# EAGLE board A500-EXT-IDE..v1.0.0 (EAGLE 9.0.0), part 1 of 2
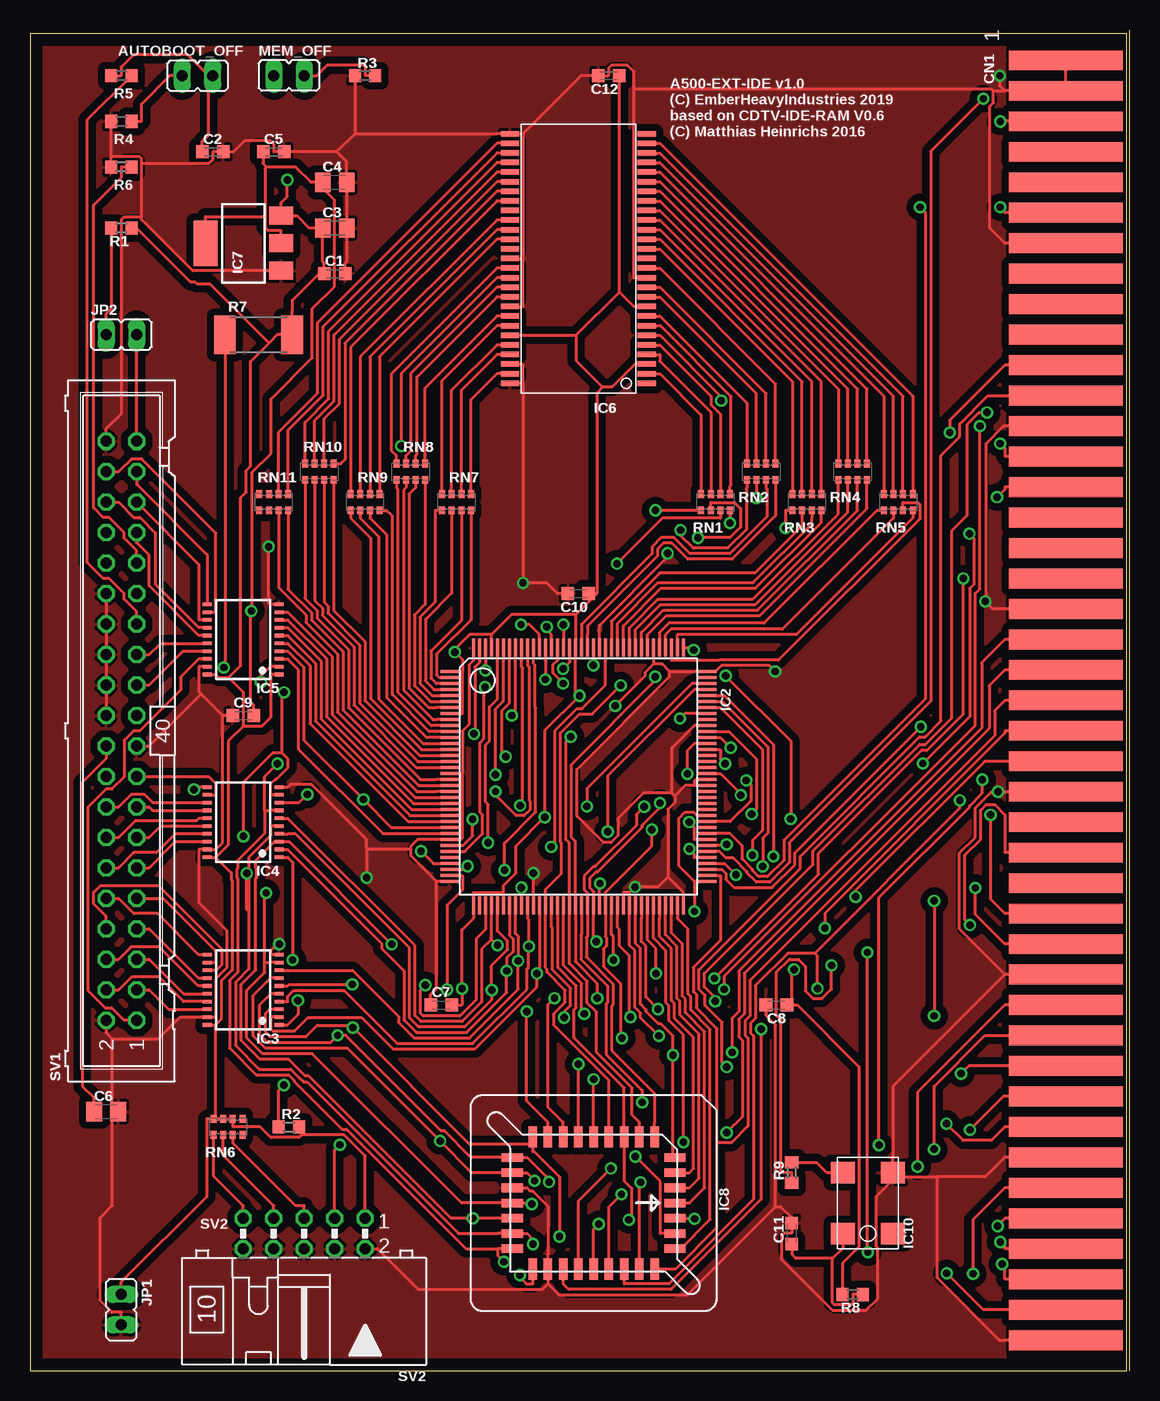
[diagram p0: board, top side]
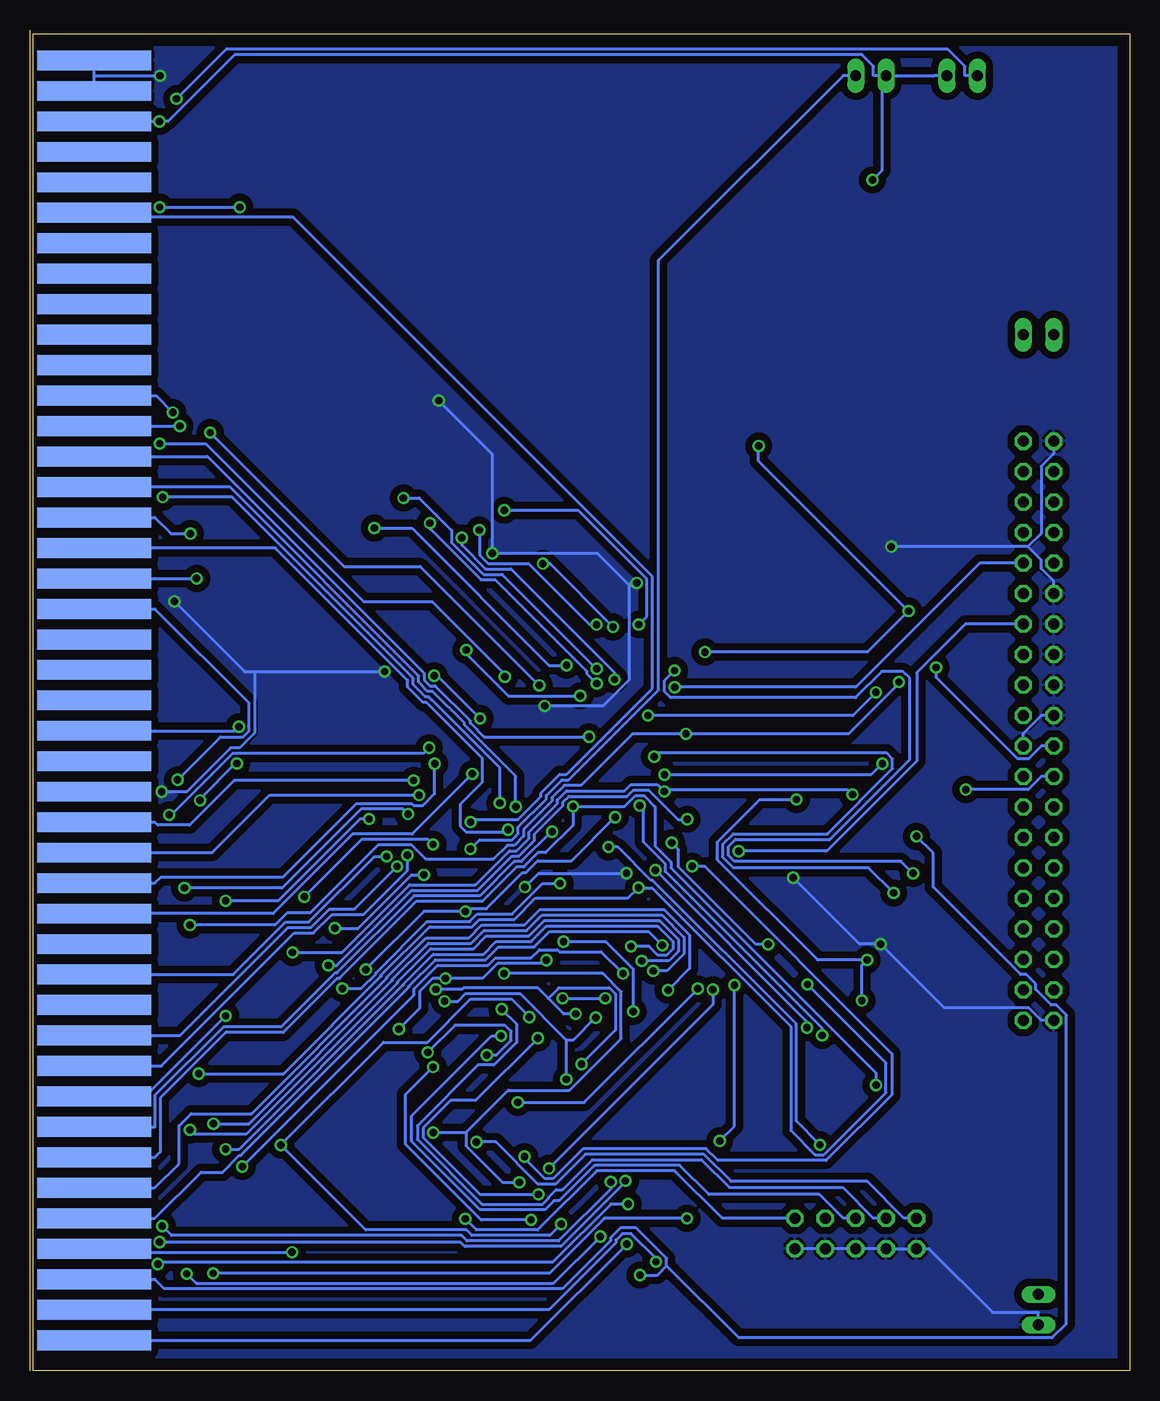
[diagram p1: board, bottom side, seen from below]

Size 91.42 x 111.43 mm. Coordinates in mm from the lower left corner, seen from the top.
Outline: 0,0 91.42,0 91.42,111.43 0,111.43 0,0
Copper layers (1*16): Top 0.035mm / dielectric 0.36mm / Bottom 0.035mm
Design rules "default *": minimum track width 10mil, minimum drill 24mil, track to track 8mil, track to pad 8mil, pad to pad 8mil, via to via 8mil, smd to smd 8mil, copper to edge 40mil, drill to drill 8mil, minimum pad ring 10mil, minimum via ring 8mil, stop-mask expansion 4mil, vias tented up to drill 0mil, thermal gap 10mil

## Footprints (pad centres in the part's own frame; a part is rotated, then mirrored left to right if it is on the bottom)
JP1 = drill 0.914 long: 1 0,-1.27; 2 0,1.27
C0603K = smd 1.05 x 1.08: 1 -0.875,0; 2 0.875,0
C0805K = smd 1.3 x 1.6: 1 -1,0; 2 1,0
LKONT_43-SLOT-SOLDER = smd 1.65 x 9.5: 1 -53.34,5.08; 3 -50.8,5.08; 5 -48.26,5.08; 7 -45.72,5.08; 9 -43.18,5.08; 11 -40.64,5.08; 13 -38.1,5.08; 15 -35.56,5.08; 17 -33.02,5.08; 19 -30.48,5.08; 21 -27.94,5.08; 23 -25.4,5.08; 25 -22.86,5.08; 27 -20.32,5.08; 29 -17.78,5.08; 31 -15.24,5.08; 33 -12.7,5.08; 35 -10.16,5.08; 37 -7.62,5.08; 39 -5.08,5.08; 41 -2.54,5.08; 43 0,5.08; 45 2.54,5.08; 47 5.08,5.08; 49 7.62,5.08; 51 10.16,5.08; 53 12.7,5.08; 55 15.24,5.08; 57 17.78,5.08; 59 20.32,5.08; 61 22.86,5.08; 63 25.4,5.08; 65 27.94,5.08; 67 30.48,5.08; 69 33.02,5.08; 71 35.56,5.08; 73 38.1,5.08; 75 40.64,5.08; 77 43.18,5.08; 79 45.72,5.08; 81 48.26,5.08; 83 50.8,5.08; 85 53.34,5.08 | smd 1.65 x 9.5 bottom: 2 -53.34,5.08; 4 -50.8,5.08; 6 -48.26,5.08; 8 -45.72,5.08; 10 -43.18,5.08; 12 -40.64,5.08; 14 -38.1,5.08; 16 -35.56,5.08; 18 -33.02,5.08; 20 -30.48,5.08; 22 -27.94,5.08; 24 -25.4,5.08; 26 -22.86,5.08; 28 -20.32,5.08; 30 -17.78,5.08; 32 -15.24,5.08; 34 -12.7,5.08; 36 -10.16,5.08; 38 -7.62,5.08; 40 -5.08,5.08; 42 -2.54,5.08; 44 0,5.08; 46 2.54,5.08; 48 5.08,5.08; 50 7.62,5.08; 52 10.16,5.08; 54 12.7,5.08; 56 15.24,5.08; 58 17.78,5.08; 60 20.32,5.08; 62 22.86,5.08; 64 25.4,5.08; 66 27.94,5.08; 68 30.48,5.08; 70 33.02,5.08; 72 35.56,5.08; 74 38.1,5.08; 76 40.64,5.08; 78 43.18,5.08; 80 45.72,5.08; 82 48.26,5.08; 84 50.8,5.08; 86 53.34,5.08
TQFP144 = smd 0.27 x 1.5: 1 -8.75,-10.75; 2 -8.25,-10.75; 3 -7.75,-10.75; 4 -7.25,-10.75; 5 -6.75,-10.75; 6 -6.25,-10.75; 7 -5.75,-10.75; 8 -5.25,-10.75; 9 -4.75,-10.75; 10 -4.25,-10.75; 11 -3.75,-10.75; 12 -3.25,-10.75; 13 -2.75,-10.75; 14 -2.25,-10.75; 15 -1.75,-10.75; 16 -1.25,-10.75; 17 -0.75,-10.75; 18 -0.25,-10.75; 19 0.25,-10.75; 20 0.75,-10.75; 21 1.25,-10.75; 22 1.75,-10.75; 23 2.25,-10.75; 24 2.75,-10.75; 25 3.25,-10.75; 26 3.75,-10.75; 27 4.25,-10.75; 28 4.75,-10.75; 29 5.25,-10.75; 30 5.75,-10.75; 31 6.25,-10.75; 32 6.75,-10.75; 33 7.25,-10.75; 34 7.75,-10.75; 35 8.25,-10.75; 36 8.75,-10.75; 73 8.75,10.75; 74 8.25,10.75; 75 7.75,10.75; 76 7.25,10.75; 77 6.75,10.75; 78 6.25,10.75; 79 5.75,10.75; 80 5.25,10.75; 81 4.75,10.75; 82 4.25,10.75; 83 3.75,10.75; 84 3.25,10.75; 85 2.75,10.75; 86 2.25,10.75; 87 1.75,10.75; 88 1.25,10.75; 89 0.75,10.75; 90 0.25,10.75; 91 -0.25,10.75; 92 -0.75,10.75; 93 -1.25,10.75; 94 -1.75,10.75; 95 -2.25,10.75; 96 -2.75,10.75; 97 -3.25,10.75; 98 -3.75,10.75; 99 -4.25,10.75; 100 -4.75,10.75; 101 -5.25,10.75; 102 -5.75,10.75; 103 -6.25,10.75; 104 -6.75,10.75; 105 -7.25,10.75; 106 -7.75,10.75; 107 -8.25,10.75; 108 -8.75,10.75 | smd 1.5 x 0.27: 37 10.75,-8.75; 38 10.75,-8.25; 39 10.75,-7.75; 40 10.75,-7.25; 41 10.75,-6.75; 42 10.75,-6.25; 43 10.75,-5.75; 44 10.75,-5.25; 45 10.75,-4.75; 46 10.75,-4.25; 47 10.75,-3.75; 48 10.75,-3.25; 49 10.75,-2.75; 50 10.75,-2.25; 51 10.75,-1.75; 52 10.75,-1.25; 53 10.75,-0.75; 54 10.75,-0.25; 55 10.75,0.25; 56 10.75,0.75; 57 10.75,1.25; 58 10.75,1.75; 59 10.75,2.25; 60 10.75,2.75; 61 10.75,3.25; 62 10.75,3.75; 63 10.75,4.25; 64 10.75,4.75; 65 10.75,5.25; 66 10.75,5.75; 67 10.75,6.25; 68 10.75,6.75; 69 10.75,7.25; 70 10.75,7.75; 71 10.75,8.25; 72 10.75,8.75; 109 -10.75,8.75; 110 -10.75,8.25; 111 -10.75,7.75; 112 -10.75,7.25; 113 -10.75,6.75; 114 -10.75,6.25; 115 -10.75,5.75; 116 -10.75,5.25; 117 -10.75,4.75; 118 -10.75,4.25; 119 -10.75,3.75; 120 -10.75,3.25; 121 -10.75,2.75; 122 -10.75,2.25; 123 -10.75,1.75; 124 -10.75,1.25; 125 -10.75,0.75; 126 -10.75,0.25; 127 -10.75,-0.25; 128 -10.75,-0.75; 129 -10.75,-1.25; 130 -10.75,-1.75; 131 -10.75,-2.25; 132 -10.75,-2.75; 133 -10.75,-3.25; 134 -10.75,-3.75; 135 -10.75,-4.25; 136 -10.75,-4.75; 137 -10.75,-5.25; 138 -10.75,-5.75; 139 -10.75,-6.25; 140 -10.75,-6.75; 141 -10.75,-7.25; 142 -10.75,-7.75; 143 -10.75,-8.25; 144 -10.75,-8.75
TSSOP20 = smd 0.3 x 0.75: 1 -2.925,-3; 2 -2.275,-3; 3 -1.625,-3; 4 -0.975,-3; 5 -0.325,-3; 6 0.325,-3; 7 0.975,-3; 8 1.625,-3; 9 2.275,-3; 10 2.925,-3; 11 2.925,3; 12 2.275,3; 13 1.625,3; 14 0.975,3; 15 0.325,3; 16 -0.325,3; 17 -0.975,3; 18 -1.625,3; 19 -2.275,3; 20 -2.925,3
TSOP-2_54 = smd 1.51 x 0.458: P$1 -5.7,10.4; P$2 -5.7,9.6; P$3 -5.7,8.8; P$4 -5.7,8; P$5 -5.7,7.2; P$6 -5.7,6.4; P$7 -5.7,5.6; P$8 -5.7,4.8; P$9 -5.7,4; P$10 -5.7,3.2; P$11 -5.7,2.4; P$12 -5.7,1.6; P$13 -5.7,0.8; P$14 -5.7,0; P$15 -5.7,-0.8; P$16 -5.7,-1.6; P$17 -5.7,-2.4; P$18 -5.7,-3.2; P$19 -5.7,-4; P$20 -5.7,-4.8; P$21 -5.7,-5.6; P$22 -5.7,-6.4; P$23 -5.7,-7.2; P$24 -5.7,-8; P$25 -5.7,-8.8; P$26 -5.7,-9.6; P$27 -5.7,-10.4; P$28 5.7,-10.4; P$29 5.7,-9.6; P$30 5.7,-8.8; P$31 5.7,-8; P$32 5.7,-7.2; P$33 5.7,-6.4; P$34 5.7,-5.6; P$35 5.7,-4.8; P$36 5.7,-4; P$37 5.7,-3.2; P$38 5.7,-2.4; P$39 5.7,-1.6; P$40 5.7,-0.8; P$41 5.7,0; P$42 5.7,0.8; P$43 5.7,1.6; P$44 5.7,2.4; P$45 5.7,3.2; P$46 5.7,4; P$47 5.7,4.8; P$48 5.7,5.6; P$49 5.7,6.4; P$50 5.7,7.2; P$51 5.7,8; P$52 5.7,8.8; P$53 5.7,9.6; P$54 5.7,10.4
SOT223 = smd 1.5 x 2: 1 -2.3,-3.15; 2 0,-3.15; 3 2.3,-3.15 | smd 3.8 x 2: 4 0,3.15
PLCC-32-SMT-TT = smd 0.71 x 1.78: 1 0,6.785; 2 -1.27,6.785; 3 -2.54,6.785; 4 -3.81,6.785; 14 -3.81,-6.785; 15 -2.54,-6.785; 16 -1.27,-6.785; 17 0,-6.785; 18 1.27,-6.785; 19 2.54,-6.785; 20 3.81,-6.785; 30 3.81,6.785; 31 2.54,6.785; 32 1.27,6.785 | smd 1.78 x 0.71: 5 -5.515,5.08; 6 -5.515,3.81; 7 -5.515,2.54; 8 -5.515,1.27; 9 -5.515,0; 10 -5.515,-1.27; 11 -5.515,-2.54; 12 -5.515,-3.81; 13 -5.515,-5.08; 21 5.515,-5.08; 22 5.515,-3.81; 23 5.515,-2.54; 24 5.515,-1.27; 25 5.515,0; 26 5.515,1.27; 27 5.515,2.54; 28 5.515,3.81; 29 5.515,5.08
7X5 = smd 1.8 x 2: P$1 -2.54,-2.1; P$2 2.54,-2.1; P$3 2.54,2.1; P$4 -2.54,2.1
R0603 = smd 1 x 1.1: 1 -0.85,0; 2 0.85,0
R2512 = smd 1.8 x 3.2: 1 -2.8,0; 2 2.8,0
CAY16 = smd 0.5 x 0.65: 1 -1.2,-0.675; 2 -0.4,-0.675; 3 0.4,-0.675; 4 1.2,-0.675; 5 1.2,0.675; 6 0.4,0.675; 7 -0.4,0.675; 8 -1.2,0.675
ML40 = drill 0.914 octagon: 1 -24.13,-1.27; 2 -24.13,1.27; 3 -21.59,-1.27; 4 -21.59,1.27; 5 -19.05,-1.27; 6 -19.05,1.27; 7 -16.51,-1.27; 8 -16.51,1.27; 9 -13.97,-1.27; 10 -13.97,1.27; 11 -11.43,-1.27; 12 -11.43,1.27; 13 -8.89,-1.27; 14 -8.89,1.27; 15 -6.35,-1.27; 16 -6.35,1.27; 17 -3.81,-1.27; 18 -3.81,1.27; 19 -1.27,-1.27; 20 -1.27,1.27; 21 1.27,-1.27; 22 1.27,1.27; 23 3.81,-1.27; 24 3.81,1.27; 25 6.35,-1.27; 26 6.35,1.27; 27 8.89,-1.27; 28 8.89,1.27; 29 11.43,-1.27; 30 11.43,1.27; 31 13.97,-1.27; 32 13.97,1.27; 33 16.51,-1.27; 34 16.51,1.27; 35 19.05,-1.27; 36 19.05,1.27; 37 21.59,-1.27; 38 21.59,1.27; 39 24.13,-1.27; 40 24.13,1.27
ML10L = drill 0.914 octagon: 1 -5.08,-1.27; 2 -5.08,1.27; 3 -2.54,-1.27; 4 -2.54,1.27; 5 0,-1.27; 6 0,1.27; 7 2.54,-1.27; 8 2.54,1.27; 9 5.08,-1.27; 10 5.08,1.27

## Placement (x,y rotation side)
AUTOBOOT_OFF  [JP1]  13.97,107.95 90 top
C1  100n  [C0603K]  25.4,91.44 0 top
C2  100n  [C0603K]  15.24,101.6 0 top
C3  10u  [C0805K]  25.4,95.25 0 top
C4  10u  [C0805K]  25.4,99.06 0 top
C5  100n  [C0603K]  20.32,101.6 0 top
C6  10u  [C0805K]  6.35,21.59 0 top
C7  100n  [C0603K]  34.29,30.48 0 top
C8  100n  [C0603K]  62.23,30.48 180 top
C9  100n  [C0603K]  17.78,54.61 0 top
C10  100n  [C0603K]  45.72,64.77 180 top
C11  100n  [C0603K]  63.5,11.43 90 top
C12  100n  [C0603K]  48.26,107.95 180 top
CN1  A500-EXPANSION-SLOT-SOLDER  [LKONT_43-SLOT-SOLDER]  81.28,55.88 270 top
IC2  XC95288XL-TQ144  [TQFP144]  45.72,49.53 270 top
IC3  74HCT245PW  [TSSOP20]  17.78,31.75 90 top
IC4  74HCT245PW  [TSSOP20]  17.78,45.72 90 top
IC5  74HCT245PW  [TSSOP20]  17.78,60.96 90 top
IC6  AS4C4M16S-6TCN  [TSOP-2_54]  45.72,92.71 180 top
IC7  LD117AS33TR  [SOT223]  17.78,93.98 90 top
IC8  AM29F010J-SOCKET  [PLCC-32-SMT-TT]  46.99,13.97 270 top
IC10  50MHz  [7X5]  69.85,13.97 90 top
JP1  [JP1]  7.62,5.08 180 top
JP2  [JP1]  7.62,86.36 270 top
MEM_OFF  [JP1]  21.59,107.95 270 top
R1  330  [R0603]  7.62,95.25 180 top
R2  4.7k  [R0603]  21.59,20.32 0 top
R3  4.7k  [R0603]  27.94,107.95 0 top
R4  4.7k  [R0603]  7.62,104.14 0 top
R5  4.7k  [R0603]  7.62,107.95 0 top
R6  4.7k  [R0603]  7.62,100.33 0 top
R7  750mA  [R2512]  19.05,86.36 0 top
R8  FERRITE  [R0603]  68.58,6.35 180 top
R9  47  [R0603]  63.5,16.51 90 top
RN1  33  [CAY16]  57.15,72.39 0 top
RN2  33  [CAY16]  60.96,74.93 0 top
RN3  33  [CAY16]  64.77,72.39 0 top
RN4  33  [CAY16]  68.58,74.93 0 top
RN5  33  [CAY16]  72.39,72.39 0 top
RN6  4.7k  [CAY16]  16.51,20.32 0 top
RN7  33  [CAY16]  35.56,72.39 180 top
RN8  33  [CAY16]  31.75,74.93 180 top
RN9  33  [CAY16]  27.94,72.39 180 top
RN10  33  [CAY16]  24.13,74.93 180 top
RN11  33  [CAY16]  20.32,72.39 180 top
SV1  [ML40]  7.62,53.34 90 top
SV2  [ML10L]  22.86,11.43 180 top

## Library data of the parts
AUTOBOOT_OFF JP1 JP2 MEM_OFF = jumper
C1-C12 R1-R9 = rcl
CN1 = amiga
IC2 = xilinx_xc9572xl-tq100
IC3-IC5 = 74xx-eu
IC6 = Alliance_Memory_By_element14_Batch_1
IC7 = v-reg
IC8 = am29-memory
IC10 = SMD-Crystal
RN1-RN11 = resistor-dil; OC_FARNELL: unknown; OC_NEWARK: unknown
SV1 SV2 = con-harting-ml; OC_FARNELL: unknown; OC_NEWARK: unknown

## Nets
!BERR: CN1.46 IC2.75
!BGACK: CN1.62 IC2.104
!CAS: IC2.120 RN3.3
!CFIN: CN1.12 IC2.80
!CFOUT: CN1.11 IC2.81
!DTACK: CN1.66 IC2.103
!IDE_ACT: JP2.2 SV1.39
!IDE_R: IC5.16 SV1.25
!IDE_W: IC5.17 SV1.23
!LDS: CN1.70 IC2.101
!MEM_CS: IC2.118 RN4.1
!MEM_WE: IC2.121 RN3.2
!RAS: IC2.119 RN3.4
!RESET: CN1.53 IC2.143 IC5.2
!UDS: CN1.72 IC2.105
+3V3: C4.1 C5.1 C7.2 C8.1 C9.2 C10.1 C12.1 IC2.1 IC2.8 IC2.37 IC2.42 IC2.55 IC2.73 IC2.84 IC2.109 IC2.127 IC2.141 IC6.P$3 IC6.P$9 IC6.P$43 IC6.P$49 IC7.2 IC7.4 R8.2
+5V: AUTOBOOT_OFF.1 C1.1 C2.1 C3.1 CN1.5 CN1.6 IC3.20 IC4.20 IC5.1 IC5.20 IC7.3 IC8.32 JP1.1 MEM_OFF.1 R1.1 R2.2 R5.1 R7.2 RN6.6 RN6.7 RN6.8 SV2.1
A1: CN1.29 IC2.57 IC8.12
A2: CN1.27 IC2.54 IC8.11
A3: CN1.26 IC2.52 IC8.10
A4: CN1.24 IC2.50 IC8.9
A5: CN1.21 IC2.49 IC8.8
A6: CN1.23 IC2.51 IC8.7
A7: CN1.28 IC2.53 IC8.6
A8: CN1.30 IC2.56 IC8.5
A9: CN1.32 IC2.58 IC8.27
A10: CN1.34 IC2.59 IC8.26
A11: CN1.36 IC2.60 IC8.23
A12: CN1.38 IC2.61 IC8.25
A13: CN1.39 IC2.64 IC8.4
A14: CN1.41 IC2.66 IC8.28
A15: CN1.43 IC2.74 IC8.29
A16: CN1.45 IC2.76
A17: CN1.47 IC2.79
A18: CN1.52 IC2.83
A19: CN1.54 IC2.91
A20: CN1.56 IC2.95
A21: CN1.58 IC2.96
A22: CN1.57 IC2.97
A23: CN1.59 IC2.98
A_MEM0: IC2.113 RN5.1
A_MEM1: IC2.112 RN5.2
A_MEM2: IC2.111 RN5.3
A_MEM3: IC2.110 RN5.4
A_MEM4: IC2.21 RN11.7
A_MEM5: IC2.20 RN11.8
A_MEM6: IC2.19 RN10.5
A_MEM7: IC2.17 RN10.6
A_MEM8: IC2.16 RN10.7
A_MEM9: IC2.15 RN10.8
A_MEM10: IC2.115 RN4.4
A_MEM11: IC2.14 RN9.5
AS_CPU: CN1.74 IC2.106 R2.1
AS_SOCKET: IC2.107
AUTO_BOOT_OFF: AUTOBOOT_OFF.2 IC2.78 R4.2
BA0: IC2.117 RN4.2
BA1: IC2.116 RN4.3
C_IDE_A0: IC2.24 IC5.7
C_IDE_A1: IC2.26 IC5.5
C_IDE_A2: IC2.25 IC5.6
C_IDE_CS0: IC2.22 IC5.9
C_IDE_CS1: IC2.23 IC5.8
C_IDE_R: IC2.27 IC3.1 IC4.1 IC5.4
C_IDE_W: IC2.28 IC5.3
CKE: IC2.13 RN9.6
CLK: IC2.32
CLK_EXT: IC2.30 R9.1
CLK_MEM: IC2.12 RN9.7
D0: CN1.75 IC2.134 IC3.3 IC8.13
D1: CN1.77 IC2.136 IC3.5 IC8.14
D2: CN1.79 IC2.39 IC3.7 IC8.15
D3: CN1.81 IC2.138 IC3.9 IC8.17
D4: CN1.83 IC2.140 IC4.3 IC8.18
D5: CN1.86 IC2.142 IC4.5 IC8.19
D6: CN1.84 IC2.139 IC4.7 IC8.20
D7: CN1.82 IC2.137 IC4.9 IC8.21
D8: CN1.80 IC2.135 IC4.8
D9: CN1.78 IC2.40 IC4.6
D10: CN1.76 IC2.41 IC4.4
D11: CN1.71 IC2.43 IC4.2
D12: CN1.69 IC2.44 IC3.8
D13: CN1.67 IC2.45 IC3.6
D14: CN1.65 IC2.46 IC3.4
D15: CN1.63 IC2.48 IC3.2
DQ0: IC2.133 RN1.1
DQ1: IC2.132 RN1.2
DQ2: IC2.131 RN1.3
DQ3: IC2.130 RN1.4
DQ4: IC2.129 RN2.1
DQ5: IC2.128 RN2.2
DQ6: IC2.126 RN2.3
DQ7: IC2.125 RN2.4
DQ8: IC2.10 RN8.5
DQ9: IC2.9 RN8.6
DQ10: IC2.7 RN8.7
DQ11: IC2.6 RN8.8
DQ12: IC2.5 RN7.5
DQ13: IC2.4 RN7.6
DQ14: IC2.3 RN7.7
DQ15: IC2.2 RN7.8
GND: C1.2 C2.2 C3.2 C4.2 C5.2 C6.2 C7.1 C8.2 C9.1 C10.2 C11.2 C12.2 CN1.1 CN1.2 CN1.3 CN1.4 CN1.13 CN1.25 CN1.37 CN1.49 CN1.61 CN1.73 CN1.85 IC2.18 IC2.29 IC2.36 IC2.47 IC2.62 IC2.72 IC2.89 IC2.90 IC2.99 IC2.108 IC2.114 IC2.123 IC2.144 IC3.10 IC3.19 IC4.10 IC4.19 IC5.10 IC5.19 IC6.P$6 IC6.P$12 IC6.P$28 IC6.P$41 IC6.P$46 IC6.P$52 IC6.P$54 IC7.1 IC8.16 IC8.22 IC10.P$2 JP1.2 R3.1 R4.1 R6.1 SV1.2 SV1.19 SV1.22 SV1.24 SV1.26 SV1.28 SV1.30 SV1.40 SV2.2 SV2.4 SV2.6 SV2.8 SV2.10
IDE_A0: IC5.13 SV1.35
IDE_A1: IC5.15 SV1.33
IDE_A2: IC5.14 SV1.36
IDE_CS0: IC5.11 SV1.37
IDE_CS1: IC5.12 SV1.38
IDE_IRQ: IC2.31 R6.2 SV1.31
IDE_RST: IC5.18 SV1.1
IDE_WAIT: IC2.33 R5.2 SV1.27
IDED0: IC4.12 SV1.17
IDED1: IC4.14 SV1.15
IDED2: IC4.16 SV1.13
IDED3: IC4.18 SV1.11
IDED4: IC3.12 SV1.9
IDED5: IC3.14 SV1.7
IDED6: IC3.16 SV1.5
IDED7: IC3.18 SV1.3
IDED8: IC3.17 SV1.4
IDED9: IC3.15 SV1.6
IDED10: IC3.13 SV1.8
IDED11: IC3.11 SV1.10
IDED12: IC4.17 SV1.12
IDED13: IC4.15 SV1.14
IDED14: IC4.13 SV1.16
IDED15: IC4.11 SV1.18
KEY_PIN_POWER: C6.1 R7.1 SV1.20
LDQM: IC2.124 RN3.1
MEM_OFF: IC2.77 MEM_OFF.2 R3.2
N$1: IC6.P$26 RN5.5
N$2: IC6.P$25 RN5.6
N$3: IC6.P$24 RN5.7
N$4: IC6.P$23 RN5.8
N$5: IC6.P$22 RN4.5
N$6: IC6.P$21 RN4.6
N$7: IC6.P$20 RN4.7
N$8: IC6.P$19 RN4.8
N$9: IC6.P$18 RN3.5
N$10: IC6.P$17 RN3.6
N$11: IC6.P$16 RN3.7
N$12: IC6.P$15 RN3.8
N$13: IC6.P$13 RN2.5
N$14: IC6.P$11 RN2.6
N$15: IC6.P$10 RN2.7
N$16: IC6.P$8 RN2.8
N$17: IC6.P$7 RN1.5
N$18: IC6.P$5 RN1.6
N$19: IC6.P$4 RN1.7
N$20: IC6.P$2 RN1.8
N$21: IC6.P$53 RN7.1
N$22: IC6.P$51 RN7.2
N$23: IC6.P$50 RN7.3
N$24: IC6.P$48 RN7.4
N$25: IC6.P$47 RN8.1
N$26: IC6.P$45 RN8.2
N$27: IC6.P$44 RN8.3
N$28: IC6.P$42 RN8.4
N$29: IC6.P$39 RN9.1
N$30: IC6.P$38 RN9.2
N$31: IC6.P$37 RN9.3
N$32: IC6.P$35 RN9.4
N$33: IC6.P$34 RN10.1
N$34: IC6.P$33 RN10.2
N$35: IC6.P$32 RN10.3
N$36: IC6.P$31 RN10.4
N$37: IC6.P$30 RN11.1
N$38: IC6.P$29 RN11.2
N$39: IC10.P$3 R9.2
N$42: JP2.1 R1.2
R/W: CN1.68 IC2.102
ROM_B0: IC2.68 IC8.3
ROM_B1: IC2.69 IC8.2
ROM_B2: IC2.70 IC8.1
ROM_B3: IC2.71 IC8.30
ROM_OE: IC2.35 IC8.24
ROM_WE: IC2.34 IC8.31
TCK: IC2.67 RN6.1 SV2.9
TDI: IC2.63 RN6.3 SV2.5
TDO: IC2.122 SV2.3
TMS: IC2.65 RN6.2 SV2.7
UDQM: IC2.11 RN9.8
VCC-X: C11.1 IC10.P$4 R8.1